# EAGLE board 2-cell-LiPo-Charger-Basic-v10 (EAGLE 6.4)
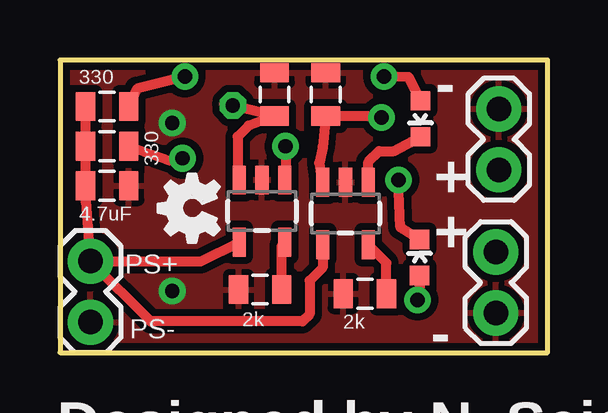
[diagram p0: board, top side]
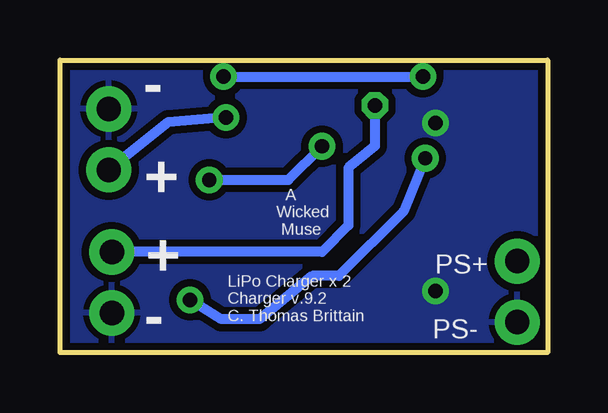
[diagram p1: board, bottom side, seen from below]

Size 20.32 x 12.19 mm. Coordinates in mm from the lower left corner, seen from the top.
Outline: 20.32,0 20.32,12.19 0,12.19 0,0 20.32,0
Copper layers (1*16): Top 0.035mm / dielectric 1.5mm / Bottom 0.035mm
Design rules "SparkFun": minimum track width 8mil, minimum drill 20mil, track to track 8mil, track to pad 8mil, pad to pad 8mil, via to via 8mil, smd to smd 6mil, copper to edge 8mil, drill to drill 8mil, minimum pad ring 12mil, minimum via ring 10mil, stop-mask expansion 4mil, vias tented up to drill 25mil, thermal gap 10mil

## Footprints (pad centres in the part's own frame; a part is rotated, then mirrored left to right if it is on the bottom)
0805 = smd 0.8 x 1.2: 1 -0.9,0; 2 0.9,0
LED-0603 = smd 0.8 x 0.8: A 0,-0.75; C 0,0.75
1X02 = drill 1.016 pad 1.88: 1 0,0; 2 2.54,0
SOT23-5 = smd 0.55 x 1.2: 1 -0.95,-1.3; 2 0,-1.3; 3 0.95,-1.3; 4 0.95,1.3; 5 -0.95,1.3

## Placement (x,y rotation side)
C1  4.7uF  [0805]  11.07,10.76 90 top
C3  4.7uF  [0805]  1.96,6.95 0 top
C4  4.7uF  [0805]  8.94,10.76 90 top
D1  RED  [LED-0603]  15.02,9.74 180 top
D11  RED  [LED-0603]  14.98,3.96 0 top
JP1  [1X02]  18.16,1.65 90 top
JP2  [1X02]  18.29,10.15 270 top
JP3  [1X02]  1.27,3.81 270 top
R1  330  [0805]  1.96,10.25 180 top
R2  2K  [0805]  12.7,2.46 180 top
R3  330  [0805]  1.96,8.6 180 top
R4  2K  [0805]  8.34,2.63 180 top
U1  MCP73831  [SOT23-5]  8.41,5.89 180 top
U2  MCP73831  [SOT23-5]  11.89,5.79 180 top
U$2  [BAND_LOGO_SMALL]  22.93,1.94 0 top
U$3  [OSHW_FILLX100_NOTEXT]  6.63,4.6 90 top

## Library data of the parts
C1 C3 C4 D1 D11 JP1-JP3 R1-R4 U1 U2 = SparkFun
U$2 = Random parts
U$3 = ohw-logo

## Nets
GND: C1.2 C3.2 C4.2 JP1.1 JP2.1 JP3.2 R2.2 R4.2 U1.2 U2.2
N$1: D1.A R1.1
N$3: D11.A R3.1
PROG: R4.1 U1.5
PROG1: R2.1 U2.5
STAT: D11.C U1.1
STAT1: D1.C U2.1
VCC: C4.1 JP1.2 U1.3
VCC2: C1.1 JP2.2 U2.3
VIN: C3.1 JP3.1 R1.2 R3.2 U1.4 U2.4

## Tracks (layer width: path | path; a pad name or v marks a point on that pad's centre or on a via)
GND  (via drill 0.6)
  other vias: 4.68,9.56 4.68,2.56
  pour Bottom (isolate 0.305): 0,0 0.13,12.19 20.83,12.19 20.7,0
  pour Top (isolate 0.305): 0.13,12.19 20.83,12.19 20.7,0 0,0
N$1  (via drill 0.6)
  Top 0.406: D1.A 14.52,11.48 v13.5,11.5 | v5.2,11.5 3.2,10.99 R1.1
  Bottom 0.406: v13.5,11.5 v5.2,11.5
N$3  (via drill 0.6)
  Top 0.406: R3.1 4.6,8 v5.1,8.1 | v14.9,2.2 15,2.59 D11.A
  Bottom 0.406: v5.1,8.1 6,5.9 8.7,3.2 9.8,3.2 12,1.4 13.6,1.4 v14.9,2.2
PROG
  Top 0.406: R4.1 9.24,4.47 U1.5
PROG1
  Top 0.406: R2.1 13.6,3.74 U2.5
STAT  (via drill 0.6)
  Top 0.406: D11.C 14.18,5.22 v14.1,7.2 | v9.4,8.6 9.4,7.23 U1.1
  Bottom 0.406: v14.1,7.2 10.8,7.2 v9.4,8.6
STAT1
  Top 0.406: U2.1 12.85,7.95 13.3,8.4 13.91,8.4 D1.C
VCC  (via drill 0.6)
  Top 0.406: U1.3 7.4,7.26 7.4,9 7.86,9.46 C4.1 6.84,10.36 v7.2,10.3 | 18.29,4.32 JP1.2
  Bottom 0.406: v7.2,10.3 7.2,8.6 8.3,7.7 8.3,5.3 9.4,4.2 JP1.2
VCC2  (via drill 0.6)
  Top 0.406: U2.3 10.9,7.14 10.8,7.9 10.94,8.56 C1.1 12.86,9.86 v13.4,9.8
  Bottom 0.406: v13.4,9.8 15.8,9.6 JP2.2
VIN
  Top 0.406: JP3.1 1.69,3.81 3.3,3.8 5.86,3.8 U1.4 | JP3.1 1.06,6.3 C3.1 R3.2 R1.2 | U2.4 10.95,3.54 10.4,3 10.4,1.6 10.1,1.3 3.78,1.3 JP3.1

## Text on the board
tPlace: - | + | + | - | Designed by N. Seidle | Redesigned by C. Thomas Brittain / 8-10-13 / www.ubermentis.com
bPlace: - | + | + | -
_tsilk: 330 | 330 | 4.7uF | PS+ | PS- | 2k | 2k
_bsilk: A / Wicked / Muse | PS+ | PS- | LiPo Charger x 2 / Charger v.9.2 / C. Thomas Brittain